# Altium PCB ArtFire.PcbDoc
Units mm, origin at the board's own origin, x right, y up, seen from the top; angles counter-clockwise.
Board outline 96 x 89 mm, 2 copper layers (Top Layer, Bottom Layer); 111 components, 87 nets, 382 pads, 157 vias.
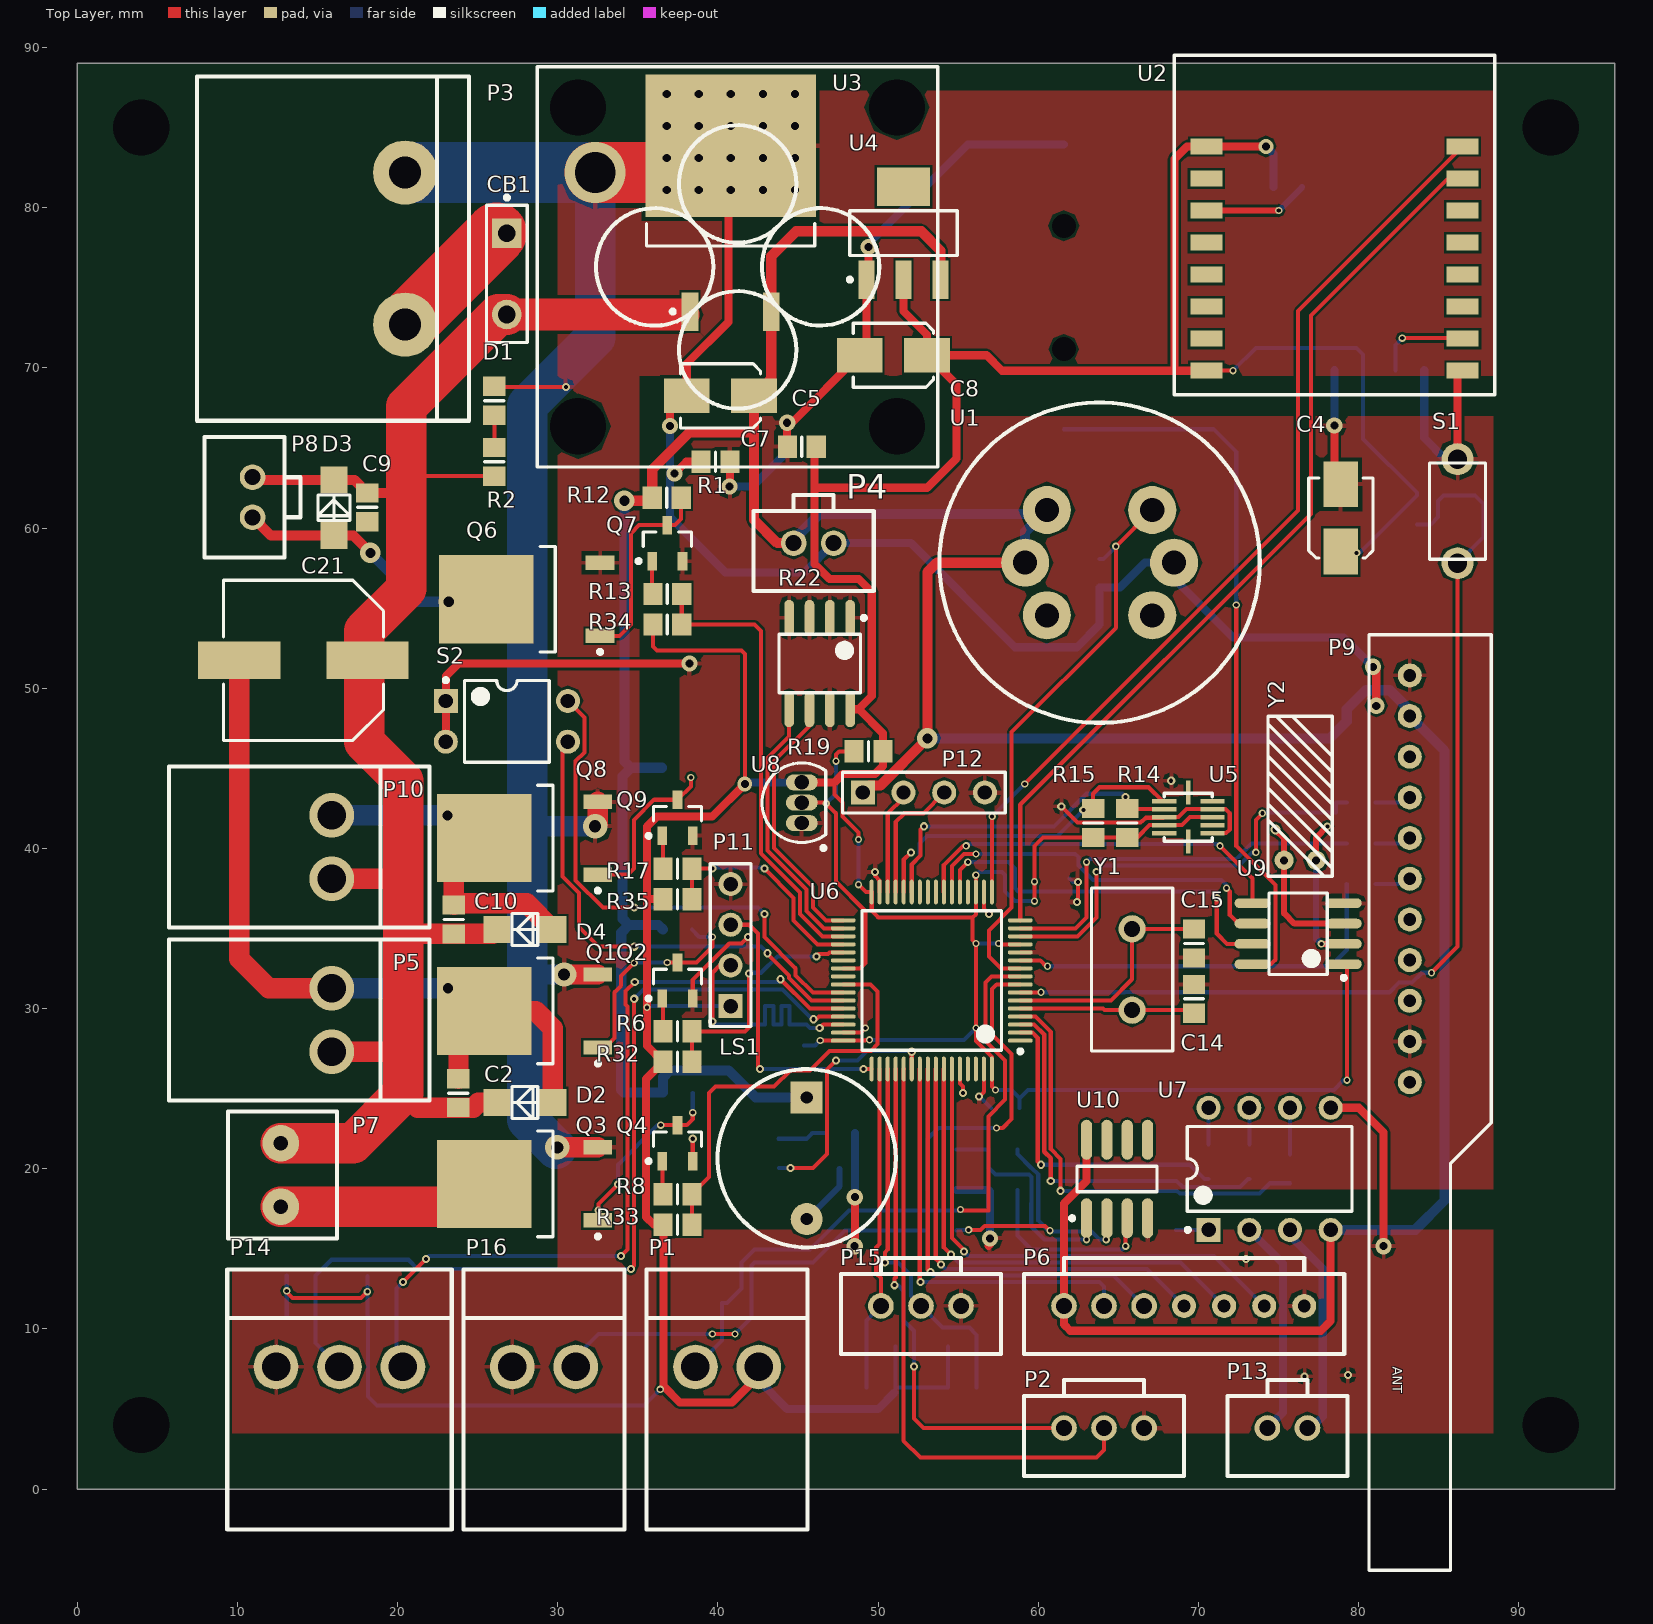
[diagram p0: Top Layer view]
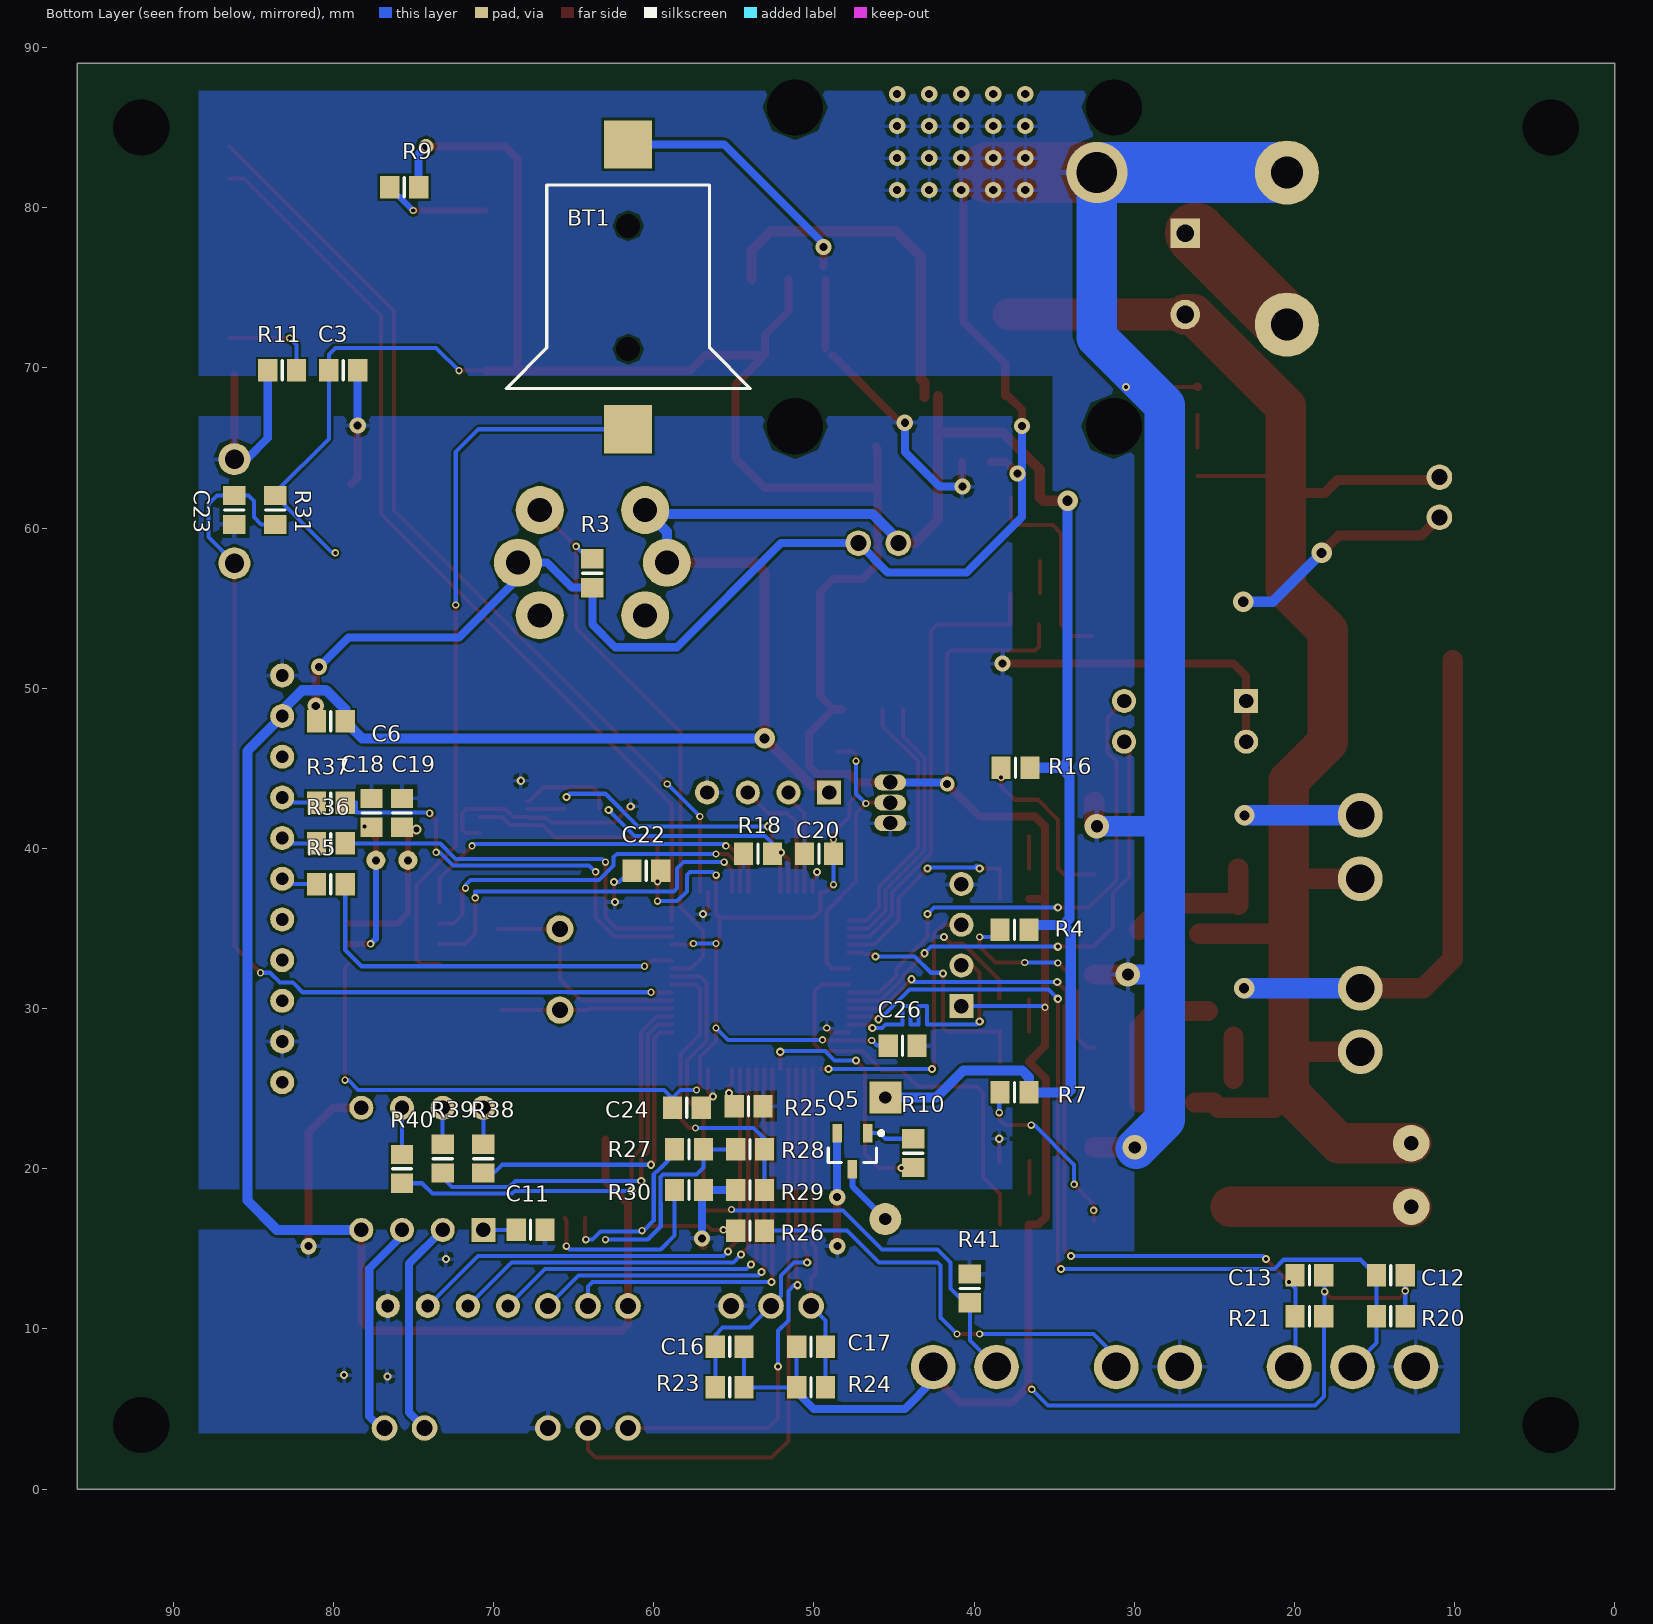
[diagram p1: Bottom Layer view, seen from below]

## Layer stack, top to bottom
Top Solder: solder mask 0.0102, Solder Resist, Dk 3.5
Top Layer: signal copper 0.0356
Dielectric 1: dielectric 0.32, FR-4, Dk 4.8
Bottom Layer: signal copper 0.0356
Bottom Solder: solder mask 0.0102, Solder Resist, Dk 3.5

## Board outline
0,0 96,0 96,89.002 0,89.002 0,89

## Design rules (kind name [scope] priority, off if disabled: settings)
Clearance [All] p1: gap=0.152
MinimumSolderMaskSliver [All] p1: minsoldermaskwidth=0.025
PolygonConnect [All] p1: connectstyle=Relief reliefconductorwidth=0.254 reliefentries=4 polygonreliefangle="90 Angle" airgapwidth=0.254
RoutingVias [All] p1: holewidth=0.254 width=0.457 viastyle="Through Hole" minholewidth=0.254 minwidth=0.457 maxholewidth=10 maxwidth=10
SilkToBoardRegionClearance [All] p1 off:
SilkToSilkClearance [All] p1 off: silktosilkclearance=0.254
SilkToSolderMaskClearance [IsPad] p1: minsilkscreentomaskgap=0 clearancetoexposedcopper=TRUE
SolderMaskExpansion [All] p1: expansion=0.102
UnpouredPolygon [All] p1: allowunpoured=FALSE
Width [All] p1: maxlimit=10 minlimit=0.25 preferedwidth=0.25
25 further rules are at their usual default settings.

## Components (designator, comment, footprint, x,y, rotation, side; value= is the part's Value field where it differs from the comment)
BT1 "Battery" Battery_1302 61.598,66.167 r90 bottom
C2 "Cap Semi" 6-0805_N 23.802,24.714 r90 top
C3 "Cap Semi" 6-0805_N 79.39,69.85 r180 bottom
C4 "Cap Pol1" Cap_5*4mm 78.895,60.63 r90 top
C5 "Cap Pol1" Cap_5*4mm 40.16,68.25 r180 top
C6 "Cap Semi" 6-0805_N 80.165,47.93 r0 bottom
C7 "Cap Semi" 6-0805_N 45.24,65.075 r180 top
C8 "Cap Pol1" Cap_5*4mm 50.955,70.79 r180 top
C9 "Cap Semi" 6-0805_N 18.113,61.29 r270 top
C10 "Cap Semi" 6-0805_N 23.51,35.56 r90 top
C11 "Cap Semi" 6-0805_N 67.694,16.18 r0 bottom
C12 "Cap Semi" 6-0805_N 13.985,13.335 r180 bottom
C13 "Cap Semi" 6-0805_N 19.065,13.335 r180 bottom
C14 "Cap Semi" 6-0805_N 69.726,30.607 r90 top
C15 "Cap Semi" 6-0805_N 69.726,34.062 r270 top
C16 "Cap Semi" 6-0805_N 55.26,8.89 r180 bottom
C17 "Cap Semi" 6-0805_N 50.18,8.89 r0 bottom
C18 "Cap Semi" 6-0805_N 77.625,42.215 r270 bottom
C19 "Cap Semi" 6-0805_N 75.72,42.215 r270 bottom
C20 "Cap Semi" 6-0805_N 49.685,39.675 r0 bottom
C21 "Cap Pol1" CAP_10*10MM 14.125,51.74 r180 top
C22 "Cap Semi" 6-0805_N 60.467,38.608 r0 bottom
C23 "Cap Semi" 6-0805_N 86.185,61.125 r90 bottom
C24 "Cap Semi" 6-0805_N 57.94,23.8 r180 bottom
C26 "Cap Semi" 6-0805_N 44.465,27.686 r180 bottom
CB1 "RF16700" SPST-2 26.825,75.87 r270 top
D1 "PWR" 6-0805_N 26.05,67.945 r90 top
D2 "Diode" US1M 27.955,24.13 r180 top
D3 "Diode" US1M 16.03,61.265 r90 top
D4 "Diode" US1M 27.955,34.925 r180 top
LS1 "Buzzer" BUZZER 45.545,20.65 r90 top
P1 "Alcohol_C" CH3.96_2P 42.56,7.62 r180 top
P2 "Alcohol_Detect" XH2.54-3P 61.61,3.81 r0 top
P3 "HB-9500" HB-9500 20.475,72.695 r90 top
P4 "Fan" XH2.54-2P 44.732,59.055 r0 top
P5 "Pump2" CH3.96_2P 15.89,27.305 r90 top
P6 "XH2.54-7P" XH2.54-7P 61.61,11.43 r0 top
P7 "Fire_Up" KF3.96_2P 12.715,21.59 r0 top
P8 "Fan" XH2.54-2P 10.95,63.17 r270 top
P9 "Superheterodyne_Receiver" Sperheterodyne_Receiver 83.2,25.4 r180 top
P10 "Pump_1" CH3.96_2P 15.89,38.1 r90 top
P11 "Debug_Port" HDR1X4 40.795,30.15 r90 top
P12 "UART_Debug_Port" HDR1X4 49.05,43.485 r0 top
P13 "Speaker" XH2.54-2P 74.31,3.81 r0 top
P14 "Fire_Detect" CH3.96_3P 20.335,7.62 r180 top
P15 "Leakage_Detect" XH2.54-3P 50.18,11.43 r0 top
P16 "Thermocouple" CH3.96_2P 31.13,7.62 r180 top
Q1 "ADO484" DPAK_AOD484 27.955,29.845 r180 top
Q2 "NPN" SOT-23_N 37.48,31.75 r90 top
Q3 "ADO484" DPAK_AOD484 27.955,19.05 r180 top
Q4 "NPN" SOT-23_N 37.48,21.59 r90 top
Q5 "NPN" SOT-23_N 47.602,21.095 r270 bottom
Q6 "ADO484" DPAK_AOD484 28.095,55.55 r180 top
Q7 "NPN" SOT-23_N 36.845,59.055 r90 top
Q8 "ADO484" DPAK_AOD484 27.955,40.64 r180 top
Q9 "NPN" SOT-23_N 37.48,41.91 r90 top
R1 "Res3" 6-0805_N 39.855,64.135 r0 top
R2 "Res" 6-0805_N 26.05,64.135 r270 top
R3 "Res3" 6-0805_N 63.833,57.176 r270 bottom
R4 "Res3" 6-0805_N 37.48,34.925 r0 bottom
R5 "Res3" 6-0805_N 80.165,37.77 r180 bottom
R6 "Res3" 6-0805_N 37.48,28.575 r180 top
R7 "Res3" 6-0805_N 37.48,24.765 r0 bottom
R8 "Res3" 6-0805_N 37.48,18.415 r180 top
R9 "Res3" 6-0805_N 75.58,81.28 r180 bottom
R10 "Res3" 6-0805_N 43.792,20.968 r270 bottom
R11 "Res3" 6-0805_N 83.2,69.85 r0 bottom
R12 "Res3" 6-0805_N 36.807,61.9 r0 top
R13 "Res3" 6-0805_N 36.845,55.88 r180 top
R14 "Res3" 6-0805_N 65.56,41.58 r90 top
R15 "Res3" 6-0805_N 63.426,41.58 r90 top
R16 "Res3" 6-0805_N 37.417,45.034 r0 bottom
R17 "Res3" 6-0805_N 37.48,38.735 r180 top
R18 "Res3" 6-0805_N 53.495,39.675 r180 bottom
R19 "Res3" 6-0805_N 49.406,46.05 r0 top
R20 "Res3" 6-0805_N 13.985,10.795 r180 bottom
R21 "Res3" 6-0805_N 19.065,10.795 r180 bottom
R22 "AT24C02" SOP8_TDA2822 46.358,51.537 r270 top
R23 "Res3" 6-0805_N 55.26,6.35 r180 bottom
R24 "Res3" 6-0805_N 50.18,6.35 r0 bottom
R25 "Res3" 6-0805_N 54.079,23.902 r0 bottom
R26 "Res3" 6-0805_N 53.99,16.129 r0 bottom
R27 "Res3" 6-0805_N 57.8,21.209 r180 bottom
R28 "Res3" 6-0805_N 53.99,21.209 r0 bottom
R29 "Res3" 6-0805_N 53.99,18.669 r180 bottom
R30 "Res3" 6-0805_N 57.8,18.669 r0 bottom
R31 "Res3" 6-0805_N 83.645,61.125 r270 bottom
R32 "Res3" 6-0805_N 37.48,26.67 r180 top
R33 "Res3" 6-0805_N 37.48,16.51 r180 top
R34 "Res3" 6-0805_N 36.845,53.975 r180 top
R35 "Res3" 6-0805_N 37.48,36.83 r180 top
R36 "Res3" 6-0805_N 80.165,40.31 r180 bottom
R37 "Res3" 6-0805_N 80.165,42.85 r180 bottom
R38 "Res3" 6-0805_N 70.64,20.625 r270 bottom
R39 "Res3" 6-0805_N 73.18,20.625 r270 bottom
R40 "Res3" 6-0805_N 75.72,19.99 r270 bottom
R41 "Res3" 6-0805_N 40.262,12.522 r270 bottom
S1 "Reset" SWP_PB_6.5mm 86.185,64.3 r270 top
S2 "SW DIP-2" DIP-4 26.825,47.93 r0 top
U1 "MQ_Alcohol" MQ 63.833,57.836 r0 top
U2 "ESP-07" ESP-07_Wifi 70.5,83.82 r0 top
U3 "L7805CD2T-TR" D2PAK_N 40.795,80.315 r90 top
U4 "AMS1117" SOT223_N 51.59,78.41 r90 top
U5 "MMA7660FC" DFN-10P 69.37,40.945 r90 top
U6 "STM32F103RBT7" LQFP64_L 53.355,31.75 r180 top
U7 "YF017" DIP-8 74.45,19.99 r90 top
U8 "DS18B20" TO-92A 45.24,42.85 r0 top
U9 "DS1302" SOP8_TDA2822 76.228,34.671 r180 top
U10 "LM358AMX" M08A_M 64.925,19.355 r90 top
Y1 "XTAL" XTAL 65.865,32.436 r270 top
Y2 "XTAL" 32.768Cystal 75.355,39.255 r90 top

## Footprints (in the part's own frame and the unit in brackets; to place one, negate y for a bottom-side part, rotate by r counter-clockwise, add the part's x,y. Pads: shape width x height; smd on the part's side, far side on the other; paste and mask are expansions set on the pad)
6-0805_N [mm] "Chip Resistor, Body 2.0x1.2mm, IPC Medium Density"
  rect 1.2x1.4 smd: 1(-0.9,0) 2(0.9,0)
  silkscreen extent 0,-0.6 0,0.6, body extent -1.07,-0.7 1.07,0.7, height 0.7
32.768Cystal [mm]
  round 1.2 hole 0.5: 1(0,0) 2(0,-2)
  silkscreen extent -1,-3 9,1
Battery_1302 [mm]
  rect 3x3 smd: 1(0,0) 2(17.78,0)
  round 1 hole 1.5: 3(12.7,0) 4(5,0)
  silkscreen extent 2.54,-7.62 15.24,7.62
BUZZER [mm]
  rect 2x2 hole 0.762: 1(3.8,0)
  round 2 hole 0.762: 2(-3.8,0)
  silkscreen extent -5.57,-5.57 5.57,5.56
Cap_5*4mm [mm]
  rect 2.85x2.15 smd: 1(-2.1,0) 2(2.1,0)
  silkscreen extent -2.5,-2 2.5,2, body extent -2.5,-2 2.5,2, height 6
CAP_10*10MM [mm]
  rect 5.15x2.35 smd: 1(-4,0) 2(4,0)
  silkscreen extent -5,-5 5,5, body extent -5,-5 5,5, height 10
CH3.96_2P [mil]
  round 110 hole 70: 1(0,0) 2(155.91,0)
  silkscreen extent -120,-240 276,400
CH3.96_3P [mil]
  round 110 hole 70: 1(0,0) 2(155.91,0) 3(311.81,0)
  silkscreen extent -120,-240 432,400
D2PAK_N [mm] "D2-PAK, 4-Leads, Body 8.8x10.4mm, Pitch 2.54mm, Lead Span 15.1mm, IPC Medium Density"
  rect 2.4x1.05 smd: 1(-6.8,2.54) 3(-6.8,-2.54)
  rect 8.9x10.65 smd: 2(3.55,0)
  silkscreen extent -6.92,-5.25 -1.3,5.25, body extent -2.7,-5.28 6.3,5.28, height 4.69
DFN-10P [mm]
  rect 1.5x0.3 smd: 0(-0.508,0) 0(2.54,0)
  rect 0.3x1.5 smd: 1(0,-1.5) 2(0.5,-1.5) 3(1,-1.5) 4(1.5,-1.5) 5(2,-1.5) 6(2,1.5) 7(1.5,1.5) 8(1,1.5) 9(0.5,1.5) 10(0,1.5)
  silkscreen extent -0.5,-1.5 2.5,1.5
DIP-4 [mm] "DIP; 4 Leads; Row Spacing 7.62 mm; Pitch 2.54 mm"
  rect 1.5x1.5 hole 0.9: 1(-3.81,1.27)
  round 1.5 hole 0.9: 2(-3.81,-1.27) 3(3.81,-1.27) 4(3.81,1.27)
  silkscreen extent -3.93,-2.55 2.65,2.69, body extent -3.15,-2.5 3.15,2.5, height 5.6
DIP-8 [mm] "DIP; 8 Leads; Row Spacing 7.62 mm; Pitch 2.54 mm"
  rect 1.5x1.5 hole 0.9: 1(-3.81,3.81)
  round 1.5 hole 0.9: 2(-3.81,1.27) 3(-3.81,-1.27) 4(-3.81,-3.81) 5(3.81,-3.81) 6(3.81,-1.27) 7(3.81,1.27) 8(3.81,3.81)
  silkscreen extent -3.93,-5.15 2.65,5.23, body extent -3.6,-5.15 3.6,5.15, height 5.08
DPAK_AOD484 [mm] "D-PAK, 3-Pads, Body 5.95x6.66mm (max), IPC Medium Density"
  rect 1.8x0.9 smd: 1(-4.55,2.28) 3(-4.55,-2.28)
  rect 5.9x5.5 smd: 2(2.55,0)
  silkscreen extent -4.68,-3.3 -0.8,3.4, body extent -1.75,-3.3 3.95,3.3, height 2.38
ESP-07_Wifi [mm]
  rect 2x1 smd: 1(0,0) 2(0,-2) 3(0,-4) 4(0,-6) 5(0,-8) 6(0,-10) 7(0,-12) 8(0,-14) 9(16,-14) 10(16,-12) 11(16,-10) 12(16,-8) 13(16,-6) 14(16,-4) 15(16,-2) 16(16,0)
  silkscreen extent -2,-15.5 18,5.7
HB-9500 [mm]
  round 4 hole 2: 1(0,0) 2(9.5,0)
  silkscreen extent -6,-4 15.5,13
HDR1X4 [mm] "Connector; Header; 4 Position"
  rect 1.5x1.5 hole 0.9: 1(0,0)
  round 1.5 hole 0.9: 2(2.54,0) 3(5.08,0) 4(7.62,0)
  silkscreen extent -1.27,-1.27 8.89,1.27
KF3.96_2P [mil]
  round 90 hole 35.43: 1(0,0) 2(0,-155.91)
  silkscreen extent -130,-234 138,78
LQFP64_L [mm] "Thin QFP, 64-Leads, Body 10x10mm, Pitch 0.5mm, IPC High Density"
  oval 1.55x0.25 smd: 1(-5.525,3.75) 2(-5.525,3.25) 3(-5.525,2.75) 4(-5.525,2.25) 5(-5.525,1.75) 6(-5.525,1.25) 7(-5.525,0.75) 8(-5.525,0.25) 9(-5.525,-0.25) 10(-5.525,-0.75) 11(-5.525,-1.25) 12(-5.525,-1.75) 13(-5.525,-2.25) 14(-5.525,-2.75) 15(-5.525,-3.25) 16(-5.525,-3.75) 33(5.525,-3.75) 34(5.525,-3.25) 35(5.525,-2.75) 36(5.525,-2.25) 37(5.525,-1.75) 38(5.525,-1.25) 39(5.525,-0.75) 40(5.525,-0.25) 41(5.525,0.25) 42(5.525,0.75) 43(5.525,1.25) 44(5.525,1.75) 45(5.525,2.25) 46(5.525,2.75) 47(5.525,3.25) 48(5.525,3.75)
  oval 0.25x1.55 smd: 17(-3.75,-5.525) 18(-3.25,-5.525) 19(-2.75,-5.525) 20(-2.25,-5.525) 21(-1.75,-5.525) 22(-1.25,-5.525) 23(-0.75,-5.525) 24(-0.25,-5.525) 25(0.25,-5.525) 26(0.75,-5.525) 27(1.25,-5.525) 28(1.75,-5.525) 29(2.25,-5.525) 30(2.75,-5.525) 31(3.25,-5.525) 32(3.75,-5.525) 49(3.75,5.525) 50(3.25,5.525) 51(2.75,5.525) 52(2.25,5.525) 53(1.75,5.525) 54(1.25,5.525) 55(0.75,5.525) 56(0.25,5.525) 57(-0.25,5.525) 58(-0.75,5.525) 59(-1.25,5.525) 60(-1.75,5.525) 61(-2.25,5.525) 62(-2.75,5.525) 63(-3.25,5.525) 64(-3.75,5.525)
  silkscreen extent -5.65,-4.35 4.35,4.55, body extent -5,-5 5,5, height 1.6
M08A_M [mm] "SOIC, 8-Leads, Body 4.9x3.9mm, Pitch 1.27mm, IPC Low Density"
  oval 2.5x0.7 smd: 1(-2.45,1.905) 2(-2.45,0.635) 3(-2.45,-0.635) 4(-2.45,-1.905) 5(2.45,-1.905) 6(2.45,-0.635) 7(2.45,0.635) 8(2.45,1.905)
  silkscreen extent -2.57,-2.5 0.8,2.93, body extent -2,-2.5 2,2.5, height 1.75
MQ [mm]
  round 3 hole 1.5: 1(-3.288,3.288) 2(-4.65,0) 3(-3.288,-3.288) 4(3.288,-3.288) 5(4.65,0) 6(3.288,3.288)
  silkscreen extent -10,-10 10,10
SOP8_TDA2822 [mm] "TSOP, 8-Leads, Body 5.00x3.95mm, Pitch 1.27mm, IPC Medium Density"
  oval 2.25x0.6 smd: 1(-2.85,1.905) 2(-2.85,0.635) 3(-2.85,-0.635) 4(-2.85,-1.905) 5(2.85,-1.905) 6(2.85,-0.635) 7(2.85,0.635) 8(2.85,1.905)
  silkscreen extent -2.97,-2.55 1.83,2.88, body extent -2,-2.55 2,2.55, height 1.55
SOT223_N [mm] "SOT223, 4-Leads, Body 6.5x3.5mm, Pitch 2.3mm, Lead Span 7mm, IPC Medium Density"
  rect 2.4x1 smd: 1(-2.9,2.3) 2(-2.9,0) 3(-2.9,-2.3)
  rect 2.4x3.3 smd: 4(2.9,0)
  silkscreen extent -3.02,-3.35 1.4,3.47, body extent -1.85,-3.35 1.85,3.35, height 1.7
SOT-23_N [mm] "SOT23, 3-Leads, Body 2.9x1.3mm, Pitch 0.95mm, Lead Span 2.5mm, IPC Medium Density"
  rect 1.15x0.6 smd: 1(-1.125,0.95) 2(-1.125,-0.95) 3(1.125,0)
  silkscreen extent -1.25,-1.5 0.7,1.92, body extent -0.7,-1.5 0.7,1.5, height 1.1
Sperheterodyne_Receiver [mm]
  round 1.5 hole 0.8: 1(0,0) 2(0,-2.54) 3(0,-5.08) 4(0,-7.62) 5(0,-10.16) 6(0,-12.7) 7(0,-15.24) 8(0,-17.78) 9(0,-20.32) 10(0,-22.86) 11(0,-25.4)
  silkscreen extent -5.08,-27.94 2.54,30.48
SPST-2 [mm] "Switch; 2 Leads"
  rect 1.85x1.85 hole 1.1: 1(-2.54,0)
  round 1.85 hole 1.1: 2(2.54,0)
  silkscreen extent -4.89,-1.27 4.28,1.27
SWP_PB_6.5mm [mm]
  round 2 hole 1.2: 1(0,0) 2(6.5,0)
  silkscreen extent 0.25,-1.75 6.25,1.75
TO-92A [mm] "TO, Flat Index; 3 In-Line, Axial Leads; Body Dia. 4.5mm; Leads 0.51 x 0.48 mm (max)"
  oval 2x1 hole 0.9: 1(0,-1.27) 2(0,0) 3(0,1.27)
  silkscreen extent -2.48,-2.95 1.5,2.48, body extent -2.5,-2.5 1.5,2.5, height 6.86
US1M [mm]
  rect 1.7x1.7 smd: 1(-1.74,0) 2(1.74,0)
  silkscreen extent -0.8,-1 0.8,1
XH2.54-2P [mm]
  round 1.6 hole 1: 1(0,0) 2(2.5,0)
  silkscreen extent -2.5,-3 5,3
XH2.54-3P [mm]
  round 1.6 hole 1: 1(0,0) 2(2.5,0) 3(5,0)
  silkscreen extent -2.5,-3 7.5,3
XH2.54-7P [mm]
  round 1.6 hole 1: 1(0,0) 2(2.5,0) 3(5,0)
  round 1.5 hole 0.8: 4(7.5,0) 5(10,0) 6(12.5,0) 7(15,0)
  silkscreen extent -2.5,-3 17.5,3
XTAL [mm]
  round 1.7 hole 1: 1(-2.54,0) 2(2.54,0)
  silkscreen extent -5.08,-2.54 5.08,2.54

## Part data
BT1: "Multicell Battery"
C2 C3 C6 C7 C9 C10 C11 C12 C13 C14 C15 C16 C17 C18 C19 C20 C22 C23 C24 C26: "Capacitor (Semiconductor SIM Model)"
C4 C5 C8 C21: "Polarized Capacitor (Radial)"
CB1: library part "Circuit Breaker", "Circuit Breaker"
D1: library part LED0, "Typical INFRARED GaAs LED"
D2 D3 D4: library part "Diode BAT17", "Silicon RF Schottky Diode for Mixer Applications in the VHF/UHF Range"
LS1: "Magnetic Transducer Buzzer"
P1 P5 P10 P16: library part CH3.96_2P
P2 P15: library part XH2.54-3P
P3: "High current connector"
P4 P8 P13: library part XH2.54-2P
P7: library part KF3.96
P11 P12: library part "Header 4", "Header, 4-Pin"
P14: library part CH3.96_3P
Q1 Q3 Q6 Q8: library part NMOS-2, "N-Channel Power MOSFET"
Q2 Q4 Q5 Q7 Q9: "NPN Bipolar Transistor"
R1 R3 R4 R5 R6 R7 R8 R9 R10 R11 R12 R13 R14 R15 R16 R17 R18 R19 R20 R21 R23 R24 R25 R26 R27 R28 R29 R30 R31 R32 R33 R34 R35 R36 R37 R38 R39 R40 R41: "Resistor"
R2: library part Res1, "Resistor"
S1: library part SW-PB, "Switch"
S2: "DIP Switch, 2 Position, SPST"
U1: library part MQ
U2: library part ESP-07_Wifi
U3: library part CMP-0244-00485-1, "Positive Voltage Regulator, 5V, 3-Pin TO-220"
U6: library part CMP-0237-00161-1, "STM32 ARM-based 32-bit MCU Performance Line with 128 kB Flash, 20 kB Internal RAM, -40 to +105°C Temperature, 64-Pin LQFP, Tray"
U10: library part CMP-0055-00768-2, "Low Power Dual Operational Amplifier, 8-pin Narrow SOIC"
Y1 Y2: "Crystal Oscillator"

## Free pads (board coordinates)
  round 1 hole 3.5: 0(4,4) 0(4,85) 0(31.267,86.258) 0(31.28,66.355) 0(51.18,66.355) 0(51.18,86.255) 0(92,4) 0(92,85)

## Via types
v1: diameter 0.457, hole 0.254, Top Layer to Bottom Layer, 59 vias
v2: diameter 0.508, hole 0.254, Top Layer to Bottom Layer, 52 vias
v3: diameter 1.016, hole 0.508, Top Layer to Bottom Layer, 33 vias
v4: diameter 1.27, hole 0.635, Top Layer to Bottom Layer, 6 vias
v5: diameter 1.524, hole 0.762, Top Layer to Bottom Layer, 3 vias
v6: diameter 3.81, hole 2.54, Top Layer to Bottom Layer, 1 vias
v7: diameter 0.914, hole 0.508, Top Layer to Bottom Layer, 1 vias
v8: diameter 0.635, hole 0.381, Top Layer to Bottom Layer, 1 vias
v9: diameter 0.965, hole 0.508, Top Layer to Bottom Layer, 1 vias

## Nets (pads, with @x,y where several pads share a name; then routed paths per layer and width w, separated by ;. In a path a pad name is that pad's centre, name@x,y a point inside that pad or via, vN(x,y) a via of type N, cw(c..) or ccw(c..) an arc to the next point about the centre after c; other vN are vias at no path point)
+3.3V: C3.1 C4.1 C7.1 C8.1 C12.2 C13.2 C16.2 C17.2 C20.1 C22.1 C24.1 C26.1 P1.1 P11.1 R9.2 R14.1 R15.1 R19.2 R20.2 R21.2 R22.8 R23.2 R24.2 R31.1 R32.2 R33.2 R34.2 R35.2 U2.1 U2.8 U4.2 U5.3 U5.9 U6.13 U6.19 U6.32 U6.48 U6.64 U8.3 U9.1 | length 342.4
  Top Layer w0.254: v1(13.085,12.371) 13.085,12.267 13.439,11.913 17.706,11.913 v1(18.113,12.319) ; R34.2 35.945,52.602 36.198,52.35 41.481,52.35 41.684,52.146 v7(41.684,44.018) ; v1(36.401,6.223) 36.604,6.426 ; v1(46.392,28) U6.48 49.186,28 49.228,28.042 v1(49.469,28.042) ; 47.272,44.12 47.272,43.374 47.78,42.866 47.78,41.986 48.785,40.981 v1(48.785,40.553) ; v1(48.785,37.73) 49.24,37.275 U6.32 49.609,37.271 49.609,36.094 50.015,35.687 55.908,35.687 ; v1(56.105,38.323) U6.19 56.105,35.884 55.908,35.687 ; v1(57.33,24.918) 57.105,25.143 U6.64 57.105,26.972 56.111,27.966 v1(56.111,28.778) v1(56.111,34.062) 55.908,34.265 55.908,35.687 ; v1(57.534,34.062) 57.595,34 U6.13 ; v1(59.769,36.703) v1(59.769,37.922) 59.769,40.158 60.291,40.68 R15.1 R14.1 66.184,40.68 66.949,41.445 U5.9 68.981,41.445 69.481,41.945 U5.3 ; U2.8@70.505,69.825 v1(72.164,69.825) ; U9.1 79.276,32.568 v1(79.276,25.527)
  Top Layer w0.508: R35.2 35.715,36.83 35.574,36.689 ; v7(41.684,44.018) 39.652,41.986 36.198,41.986 35.574,41.362 35.574,36.689 ; P1.1 42.56,7.099 40.871,5.41 37.62,5.41 36.604,6.426 36.604,16.486 R33.2 35.995,16.51 35.512,16.993 35.512,25.602 R32.2 35.574,27.676 35.574,36.689 ; U8.3 47.272,44.12 47.793,44.641 49.812,44.641 50.306,45.135 R19.2 50.306,47.182 48.801,48.687 48.791,48.687 ; C7.1 46.026,64.961 46.026,62.51 ; R22.8 48.791,48.687 ; U4.2 51.59,73.533 53.055,72.068 C8.1 ; U2.8 68.506,69.82 ; v9(74.222,83.82) U2.1 69.294,83.82 68.506,83.033 68.506,69.82 ; 46.026,62.51 53.063,62.51 54.892,64.338 54.892,68.953 C8.1 ; 46.026,62.51 46.026,57.762 46.967,56.82 48.796,56.82 49.609,56.007 49.609,49.505 48.791,48.687 ; C8.1 56.772,70.79 57.742,69.82 68.506,69.82
  Bottom Layer w0.254: R20.2 v1(13.085,12.371) C12.2 ; R21.2@18.113,10.847 v1(18.113,12.319) C13.2@18.113,13.283 ; R21.2 18.165,5.765 18.722,5.207 35.385,5.207 v1(36.401,6.223) ; v1(35.574,30.074) 35.65,30.15 P11.1 ; C26.1 46.078,27.686 v1(46.392,28) ; v1(48.785,37.73) C20.1 v1(48.785,40.553) ; v1(49.469,28.042) 55.374,28.042 v1(56.111,28.778) ; C17.2 R24.2 R23.2 C16.2 ; v1(56.105,38.323) 56.314,38.532 57.737,38.532 57.94,38.329 57.94,37.313 58.55,36.703 v1(59.769,36.703) ; v1(56.111,34.062) v1(57.534,34.062) ; v1(57.33,24.918) 58.346,24.918 58.84,24.424 C24.1@58.84,24.395 ; C24.1 C24.1@58.84,24.395 ; v1(72.164,69.825) 73.586,71.247 79.886,71.247 80.29,70.843 C3.1 80.29,65.56 83.645,62.205 R31.1 80.066,58.446 v1(79.886,58.446) ; v1(79.276,25.527) 79.073,25.527 78.463,24.918 59.362,24.918 C24.1@58.84,24.395
  Bottom Layer w0.508: v7(41.684,44.018) 41.786,44.12 U8.3 ; P1.1 42.56,6.77 44.326,5.004 50.015,5.004 R24.2@51.031,6.02 ; v9(74.222,83.82) 74.68,83.362 R9.2
+5V: C5.1 C6.1 LS1.1 P4.1 P6.1 P9.10 P12.1 R4.1 R7.1 R12.1 R16.1 U1.1 U1.2 U3.3 U4.3 U7.4 U10.8 | length 248.3
  Top Layer w0.508: U10.8 63.02,19.228 61.61,17.818 P6.1 61.61,10.275 62.004,9.881 77.65,9.881 78.26,10.49 U7.4
  Top Layer w0.635: v4(34.166,61.697) 35.704,61.697 R12.1 35.907,63.654 38.217,65.964 42.26,65.964 ; C5.1 42.26,65.964 ; C5.1@43.106,68.199 43.106,69.096 43.335,69.325 U3.3 43.335,76.962 44.897,78.524 52.695,78.524 53.89,77.329 U4.3 ; P4.1 43.716,59.055 42.26,60.511 42.26,65.964 ; P12.1 49.483,43.918 50.137,43.918 v4(53.083,46.863) 53.083,57.246 53.673,57.836 U1.2
  Bottom Layer w0.635: v4(34.166,61.697) 34.166,45.441 34.572,45.034 ; R16.1 34.572,45.034 ; R4.1 36.294,35.211 34.438,35.211 ; P4.1 44.732,59.258 46.358,60.884 U1.1@60.305,60.884 ; LS1.1 42.354,24.45 40.668,26.137 37.01,26.137 36.58,25.706 R7.1 34.115,24.765 33.962,24.918 33.962,34.736 34.438,35.211 ; v4(53.083,46.863) 78.198,46.863 C6.1 79.265,48.681 80.457,49.873 81.956,49.873 83.2,48.629 P9.10 85.372,46.088 85.372,18.009 83.543,16.18 U7.4 ; U1.2 59.183,59.762 U1.1@60.305,60.884 ; U1.1 U1.1@60.305,60.884 ; 34.438,35.211 34.051,35.598 34.051,44.514 34.572,45.034
+12V: C2.1 C9.1 C10.1 C21.1 CB1.2 D2.2 D3.2 D4.2 P5.1 P7.1 P8.1 P10.1 R2.2 U3.1 | length 110.9
  Top Layer w0.254: 20.667,63.235 R2.2
  Top Layer w0.635: P8.1 11.115,63.005 D3.2 17.298,63.005 C9.1 20.435,62.19
  Top Layer w1.27: P5.1 19.383,27.305 ; P10.1 19.306,38.1 ; 20.348,24.714 21.248,23.814 C2.1 24.731,23.814 25.047,24.13 D2.2 ; 20.348,34.671 D4.2@25.961,34.671 ; 20.359,34.66 C10.1
  Top Layer w2: CB1.2 U3.1@37.867,73.33
  Top Layer w2.54: P7.1 17.224,21.59 20.348,24.714 20.348,34.671 20.348,44.222 17.914,46.655 17.914,53.573 20.551,56.21 20.551,67.59 26.292,73.33 CB1.2
ADH: P2.1 U6.52 | length 32.1
  Top Layer w0.254: v2(51.031,12.726) 51.031,13.132 51.105,13.206 U6.52 ; v2(52.25,7.646) 52.25,4.394 52.835,3.81 P2.1
  Bottom Layer w0.254: v2(51.031,12.726) 51.234,12.726 51.601,12.359 51.601,10.531 52.25,9.881 v2(52.25,7.646)
ADL: P2.2 U6.53 | length 37.7
  Top Layer w0.254: U6.53 51.601,26.221 51.601,3.012 52.657,1.956 63.63,1.956 64.11,2.436 P2.2
ALC: P1.2 R41.2 U6.9 | length 42.3
  Top Layer w0.254: v1(55.146,17.45) 55.113,17.45 55.062,17.399 56.886,17.399 56.886,23.254 57.94,24.308 57.94,26.746 56.721,27.966 56.721,31.623 57.098,32 U6.9
  Bottom Layer w0.254: P1.2 40.262,9.282 R41.2 40.581,11.622 41.481,12.522 41.481,14.148 42.294,14.961 45.748,14.961 48.186,17.399 v1@55.095,17.399
ALCOHOL_C: R3.1 U1.6 U6.10 | length 35.7
  Top Layer w0.254: U6.10 57.673,32.5 56.924,33.249 56.924,34.874 58.346,36.297 58.346,47.27 64.849,53.772 v1(64.849,58.852) U1.6
  Bottom Layer w0.254: R3.1 64.072,58.076 v1(64.849,58.852)
BEE: R10.2 U6.54 | length 15.5
  Top Layer w0.254: v2(44.529,20.041) 45.951,20.041 46.824,20.914 46.824,26.197 v2(47.374,26.746) ; U6.54 v2(52.105,27.298)
  Bottom Layer w0.254: R10.2@43.819,20.041 v2(44.529,20.041) ; v2(47.374,26.746) 48.708,26.746 49.317,27.356 52.047,27.356 v2(52.105,27.298)
DEBUG_RX: P12.3 U6.29 | length 8.2
  Top Layer w0.254: U6.29 51.105,41.654 51.641,42.19 52.835,42.19 P12.3
DEBUG_TX: P12.2 U6.30 | length 6.6
  Top Layer w0.254: U6.30 50.605,42.17 51.59,43.155 P12.2
E2_SCL: R22.6 U6.33 | length 16.5
  Top Layer w0.254: R22.6 45.723,47.651 43.513,45.441 43.513,40.029 45.951,37.591 45.951,36.297 46.748,35.5 U6.33
E2_SDA: R22.5 U6.34 | length 16.9
  Top Layer w0.254: R22.5 44.453,46.99 43.106,45.644 43.106,39.861 45.545,37.423 45.545,36.094 46.638,35 U6.34
FAN: R13.1 R34.1 U6.35 | length 29
  Top Layer w0.254: R13.1 R34.1 42.294,53.975 42.7,53.569 42.7,39.693 45.138,37.254 45.138,35.89 46.529,34.5 U6.35
FHD: C13.1 P14.1 R21.1 U6.44 | length 51.4
  Top Layer w0.254: v2(20.348,12.929) v2(21.77,14.351) ; v2(33.962,14.554) 34.369,14.961 34.369,30.132 34.242,30.259 34.242,31.09 v2(34.813,31.661) v2@34.813,31.566 ; v2(43.919,31.826) 45.746,30 U6.44
  Bottom Layer w0.254: P14.1 19.942,8.013 19.942,12.522 v2(20.348,12.929) ; v2(21.77,14.351) 21.974,14.554 v2(33.962,14.554) ; v2(34.813,31.661) 43.753,31.661 v2(43.919,31.826)
FIRE_TEM_D: R28.1 R29.2 U6.8 | length 19.5
  Top Layer w0.254: v1(57.394,22.542) 57.787,22.542 58.346,23.102 58.346,27.153 57.127,28.372 57.127,31.217 57.41,31.5 U6.8
  Bottom Layer w0.254: R29.2 R28.1 53.09,21.868 53.764,22.542 v1(57.394,22.542)
FIRE_UP: R8.1 R33.1 U6.41 | length 26.1
  Top Layer w0.254: R33.1 R8.1 39.449,19.484 39.449,24.714 39.855,25.121 43.513,25.121 44.529,26.137 45.748,26.137 46.967,27.356 49.558,27.356 49.977,27.775 49.977,31.052 49.529,31.5 U6.41
FLD: C12.1 P14.2 R20.1 U6.45 | length 57.8
  Top Layer w0.254: v2(34.572,13.742) 34.775,13.945 v2(34.775,30.607) ; v2(45.976,29.331) 45.976,29.363 46.188,29.363 46.325,29.5 U6.45
  Bottom Layer w0.254: P14.2 14.885,9.11 R20.1 C12.1 15.864,14.314 20.681,14.314 21.254,13.742 v2(34.572,13.742) ; v2(34.775,30.607) 35.347,31.179 44.04,31.179 45.889,29.331 v2(45.976,29.331)
IO1: P6.2 U6.55 | length 26.1
  Top Layer w0.254: U6.55 52.605,12.981 v2(52.657,12.929)
  Bottom Layer w0.254: v2(52.657,12.929) 63.833,12.929 64.11,12.652 P6.2
IO2: P6.3 U6.56 | length 27
  Top Layer w0.254: U6.56 53.105,13.7 v2(53.266,13.538)
  Bottom Layer w0.254: v2(53.266,13.538) 53.47,13.335 64.705,13.335 P6.3
IO3: P6.4 U6.57 | length 28.6
  Top Layer w0.254: U6.57 53.605,14.355 v2(53.939,14.021)
  Bottom Layer w0.254: v2(53.939,14.021) 54.218,13.742 66.798,13.742 P6.4
IO4: P6.5 U6.58 | length 30.2
  Top Layer w0.254: U6.58 54.105,15.074 v2(54.549,14.63)
  Bottom Layer w0.254: v2(54.549,14.63) 55.031,14.148 68.892,14.148 P6.5
IO5: P6.6 U6.59 | length 32
  Top Layer w0.254: U6.59 54.605,15.675 55.362,14.919 v2(55.362,14.834)
  Bottom Layer w0.254: v2@55.362,14.707 v2(55.362,14.834) 55.641,14.554 70.986,14.554 P6.6
LDHD: C17.1 P15.1 R24.1 U6.50 | length 20.5
  Top Layer w0.254: U6.50 50.105,15.308 49.888,15.091 49.888,13.462 50.18,13.17 P15.1
  Bottom Layer w0.254: R24.1 C17.1 49.28,10.53 P15.1
LDLD: C16.1 P15.2 R23.1 U6.51 | length 23.8
  Top Layer w0.254: v2(50.422,14.148) 50.422,14.758 50.605,14.941 U6.51
  Bottom Layer w0.254: v2(50.422,14.148) 51.234,14.148 52.047,13.335 52.047,12.063 P15.2 54.026,10.084 55.705,10.084 56.16,9.629 C16.1 R23.1
MMA_SCL: R15.2 R18.2 U5.6 U6.28 | length 20.3
  Top Layer w0.254: U6.28 51.605,39.309 v2(52.047,39.751) ; R15.2 63.426,43.409 63.833,43.815 66.881,43.815 67.751,42.945 U5.6
  Bottom Layer w0.254: R18.2 52.595,40.299 53.063,40.767 61.191,40.767 v2(62.817,42.393)
MMA_SDA: R14.2 U5.7 U6.27 | length 20.3
  Top Layer w0.254: U6.27 52.105,38.996 52.657,39.548 52.657,41.174 v2(52.86,41.377) ; R14.2 65.595,42.445 U5.7
  Bottom Layer w0.254: v2(52.86,41.377) 60.988,41.377 63.02,43.409 65.255,43.409 v2(65.458,43.206)
NetBT1_1: BT1.1 U9.8 | length 45.6
  Top Layer w0.254: v1(72.367,55.194) 72.367,40.158 74.806,37.719 74.806,33.046 74.526,32.766 U9.8
  Bottom Layer w0.254: BT1.1 70.945,66.167 72.367,64.745 v1(72.367,55.194)
NetC2_2: C2.2 C21.2 D2.1 P5.2 Q1.2 | length 44.4
  Top Layer w1.27: C21.2 10.125,33.109 11.969,31.265 P5.2 ; C2.2 Q1.2@23.802,28.242 ; Q1.2 28.629,29.845 29.695,28.779 D2.1
  Bottom Layer w1.27: P5.2 v4(23.145,31.265)
NetC9_2: C9.2 D3.1 P8.2 Q6.2 | length 14.4
  Top Layer w0.635: P8.2 12.095,59.525 D3.1 17.247,59.525 18.316,58.456 v4(18.305,58.446)
  Bottom Layer w0.635: v4(18.305,58.446) 21.353,55.398 v4(23.193,55.398)
NetC10_2: C10.2 D4.1 P10.2 Q8.2 | length 16.4
  Top Layer w1.27: C10.2 C10.2@23.51,36.562 ; Q8.2@23.51,38.745 C10.2@23.51,36.562 ; D4.1 28.058,36.562 C10.2@23.51,36.562
  Bottom Layer w1.27: P10.2 v4(23.119,42.06)
NetC11_2: C11.2 U7.1 | length 2
  Bottom Layer w0.254: C11.2 U7.1
NetC14_1: C14.1 U6.5 Y1.2 | length 10.7
  Top Layer w0.254: U6.5 64.034,30 64.138,29.896 Y1.2 C14.1@69.537,29.896
NetC15_1: C15.1 U6.6 Y1.1 | length 14.5
  Top Layer w0.254: U6.6 64.538,30.5 65.865,31.826 Y1.1 C15.1@69.711,34.976
NetC18_2: C18.2 U9.2 Y2.2 | length 9.5
  Top Layer w0.381: Y2.2 77.355,40.675 v1(78.057,41.377) ; v1(77.676,34.036) U9.2
  Bottom Layer w0.381: Y2.2@77.355,39.57 Y2.2 77.355,34.357 v1(77.676,34.036)
NetC19_2: C19.2 U9.3 Y2.1 | length 9.4
  Top Layer w0.381: v8(74.806,41.174) 75.355,40.624 Y2.1 75.355,35.951 75.999,35.306 U9.3
NetC23_2: C23.2 R31.2 S1.2 U6.7 | length 62.5
  Top Layer w0.254: U6.7 60.162,31 v1(60.175,31.014) ; v1(84.559,32.233) 86.185,33.859 S1.2
  Bottom Layer w0.254: v1(60.175,31.014) 65.385,31.014 65.397,31.025 66.333,31.025 66.344,31.014 81.918,31.014 82.527,31.623 83.34,31.623 83.95,32.233 v1(84.559,32.233) ; R31.2 84.51,60.225 84.966,60.681 84.966,61.697 85.294,62.025 C23.2 87.279,62.025 87.81,61.494 87.81,59.425 S1.2
NetCB1_1: CB1.1 P3.1 | length 8.1
  Top Layer w3.81: P3.1 CB1.1@26.19,78.41
NetD1_1: D1.1 R2.1 | length 2
  Top Layer w0.254: R2.1 D1.1
NetLS1_2: LS1.2 Q5.3 | length 4
  Bottom Layer w0.381: LS1.2 47.602,18.908 Q5.3
NetP7_2: P7.2 Q3.2 | length 11.3
  Top Layer w2.54: P7.2 Q3.2@23.985,17.63
NetP9_6: P9.6 R5.1 | length 1.8
  Bottom Layer w0.254: R5.1 P9.6@82.87,37.77
NetP9_7: P9.7 R36.1 | length 2.3
  Bottom Layer w0.254: R36.1 82.87,40.31 P9.7
NetP9_8: P9.8 R37.1 | length 1.8
  Bottom Layer w0.254: R37.1 P9.8@82.87,42.85
NetP13_1: P13.1 U7.2 | length 13.6
  Bottom Layer w0.508: U7.2 75.275,14.085 75.275,4.775 P13.1
NetP13_2: P13.2 U7.3 | length 13.8
  Bottom Layer w0.508: U7.3 75.72,15.811 77.766,13.765 77.766,4.523 77.053,3.81 P13.2
NetP16_1: P16.1 R26.1 | length 28.1
  Top Layer w0.254: P16.1 P16.1@31.498,7.62 ; v1(39.652,9.678) v1(41.074,9.678)
  Bottom Layer w0.254: P16.1 31.13,8.268 32.54,9.678 v1(39.652,9.678) ; v1(41.074,9.678) 42.09,10.694 42.09,13.945 42.294,14.148 45.951,14.148 47.932,16.129 R26.1
NetQ1_1: Q1.1 Q2.3 R4.2 | length 13.8
  Top Layer w0.254: Q1.1 32.952,27.565 33.556,28.169 33.556,31.014 33.962,31.42 33.962,32.03 v1(34.775,32.842) ; v1(36.84,32.875) Q2.3 38.669,32.875 39.652,33.858 v1(39.652,34.468)
  Bottom Layer w0.254: v1(34.775,32.842) 34.808,32.875 v1(36.84,32.875) ; R4.2 38.837,34.468 v1(39.652,34.468)
NetQ2_1: Q2.1 R6.2 | length 2
  Top Layer w0.254: R6.2 Q2.1@36.58,30.575
NetQ3_1: Q3.1 Q4.3 R7.2 | length 11.4
  Top Layer w0.254: Q3.1 v1@32.505,17.364 ; v1(32.54,17.399) 32.54,17.806 v1(33.759,19.025) ; v1(36.433,22.715) Q4.3 38.059,22.715 38.433,23.089 v1(38.433,23.495)
  Bottom Layer w0.254: v1(33.759,19.025) 33.759,20.244 36.23,22.715 v1(36.433,22.715) ; v1(38.433,23.495) R7.2@38.433,24.712
NetQ4_1: Q4.1 R8.2 | length 2
  Top Layer w0.254: R8.2@36.53,18.465 Q4.1
NetQ5_1: Q5.1 R10.1 | length 3
  Bottom Layer w0.254: R10.1 45.543,21.868 45.895,22.22 Q5.1
NetQ6_1: Q6.1 Q7.3 R12.2 | length 12.8
  Top Layer w0.254: Q6.1 33.867,53.27 34.572,53.975 34.572,59.665 35.087,60.18 Q7.3 37.322,60.18 37.707,60.565 R12.2
NetQ7_1: Q7.1 R13.2 | length 2
  Top Layer w0.254: R13.2@35.895,55.93 Q7.1
NetQ8_1: Q8.1 Q9.3 R16.2 | length 10.4
  Top Layer w0.254: Q8.1 34.4,38.36 34.775,38.735 34.775,41.783 36.027,43.035 Q9.3 38.317,43.872 v1(38.317,44.425)
NetQ9_1: Q9.1 R17.2 | length 2
  Top Layer w0.254: R17.2 Q9.1@36.58,40.735
NetR9_1: R9.1 U2.3 | length 6.6
  Top Layer w0.381: U2.3 v1(75.02,79.82)
  Bottom Layer w0.381: v1(75.02,79.82) R9.1
NetR11_1: R11.1 U2.10 | length 5.9
  Top Layer w0.254: v1(82.73,71.857) U2.10@86.463,71.857
  Bottom Layer w0.254: R11.1 82.3,71.426 v1(82.73,71.857)
NetR25_2: R25.2 U6.60 | length 1.6
  Top Layer w0.254: U6.60 55.105,25.314 55.298,25.121 v2(55.298,24.714)
NetR26_2: R26.2 R27.1 U10.2 | length 17.1
  Top Layer w0.254: v1(55.654,16.18) 56.407,16.18 56.661,16.434 60.429,16.434 v1(60.734,16.129) ; v1(64.239,15.57) 64.29,15.621 U10.2
  Bottom Layer w0.254: R26.2 54.941,16.18 v1(55.654,16.18) ; R27.1 58.7,20.92 59.566,20.055 59.584,20.055 60.004,19.634 60.004,16.757 v1@60.683,16.078 ; v1@60.734,16.078 63.325,16.078 63.833,15.57 v1(64.239,15.57)
NetR27_2: R27.2 R28.2 U10.1 | length 13
  Bottom Layer w0.254: R28.2 R27.2 56.9,20.079 57.33,19.648 59.416,19.648 59.579,19.485 59.579,17.853 59.566,17.839 59.566,16.383 60.378,15.57 v1(63.02,15.57)
NetR30_2: R30.2 U10.3 | length 11.8
  Top Layer w0.254: v1(65.458,15.164) 65.458,16.803 U10.3
  Bottom Layer w0.254: R30.2 58.7,15.826 59.566,14.961 65.255,14.961 v1(65.458,15.164)
NetR38_1: R38.1 U7.8 | length 2.3
  Bottom Layer w0.254: R38.1 U7.8
NetR39_1: R39.1 U7.7 | length 2.3
  Bottom Layer w0.254: R39.1 U7.7
NetR40_1: R40.1 U7.6 | length 2.9
  Bottom Layer w0.254: R40.1 U7.6
PGND: C5.2 C6.2 C11.1 D1.2 P2.3 P3.2 P4.2 P6.7 P14.3 P15.3 P16.2 Q1.3 Q3.3 Q5.2 Q6.3 Q8.3 R1.1 R3.2 R29.1 R30.1 R41.1 U1.5 U3.2 U7.5 U10.4 | length 204.6
  Top Layer w0.254: D1.2@26.014,68.809 v2(30.508,68.809)
  Top Layer w0.508: D1.2@26.014,68.809 D1.2 ; v3(37.01,66.37) 37.01,67.386 37.874,68.25 C5.2 38.06,70.265 40.668,72.873 U3.2@40.668,80.76 ; v3(37.29,63.398) 38.026,64.135 R1.1 ; v3(48.542,15.164) 48.552,15.174 v3(48.552,18.222) ; v3@56.9,15.188 56.987,15.275 v3(56.987,15.646) ; U7.5 80.038,23.8 81.562,22.276 v3(81.562,15.164) ; v3(80.902,51.334) 81.105,51.13 v3(81.105,48.895)
  Top Layer w1.27: v5(29.968,21.33) Q3.3 ; v5(30.4,32.125) Q1.3 ; v5(32.337,41.377) 32.505,41.545 Q8.3
  Top Layer w3.81: v6(32.337,82.195) U3.2@39.125,82.195
  Bottom Layer w0.508: v3@37.01,63.398 37.01,60.681 40.465,57.226 45.403,57.226 P4.2 52.047,59.055 58.55,52.553 62.41,52.553 63.833,53.975 R3.2 65.117,56.276 66.678,57.836 U1.5 68.483,56.844 72.164,53.162 79.073,53.162 v3(80.902,51.334) ; v3@37.01,63.729 v3(37.01,66.37) ; v3(48.552,18.222) Q5.2 ; R29.1 R30.1 56.987,18.582 v3(56.987,15.646)
  Bottom Layer w1.27: 28.108,32.233 28.215,32.125 v5(30.4,32.125) ; 28.108,41.58 28.311,41.377 v5(32.337,41.377)
  Bottom Layer w2.54: v5@29.898,21.26 28.108,23.051 28.108,32.233 28.108,41.58 28.108,67.669 32.337,71.898 v6(32.337,82.195)
  Bottom Layer w3.81: P3.2 v6(32.337,82.195)
  other v2: 76.634,7.036 79.339,7.112 72.977,14.351
  other v3: 36.807,81.097 38.807,81.097 40.807,81.097 42.807,81.097 44.807,81.097 36.807,83.097 38.807,83.097 40.807,83.097 42.807,83.097 44.807,83.097 36.807,85.097 38.807,85.097 40.807,85.097 42.807,85.097 44.807,85.097 36.807,87.097 38.807,87.097 40.807,87.097 42.807,87.097 44.807,87.097
PUMP1: R17.1 R35.1 U6.36 | length 14.3
  Top Layer w0.254: R35.1 R17.1 v2(39.652,38.735) ; v2(42.903,38.735) 44.732,36.906 44.732,35.484 46.216,34 U6.36
  Bottom Layer w0.254: v2(39.652,38.735) 39.855,38.938 39.994,38.799 42.839,38.799 v2(42.903,38.735)
PUMP2: R6.1 R32.1 U6.37 | length 15.4
  Top Layer w0.254: R32.1 R6.1 41.684,28.575 41.934,28.826 v2(41.934,32.194) ; v2(46.154,33.249) 46.31,33.404 46.872,33.404 46.967,33.5 U6.37
  Bottom Layer w0.254: v2(41.934,32.194) 41.973,32.233 42.7,32.233 43.716,33.249 v2(46.154,33.249)
SGND: BT1.2 C3.2 C4.2 C7.2 C8.2 C14.2 C15.2 C18.1 C19.1 C20.2 C22.2 C23.1 C24.2 C26.2 P9.2 P9.11 P11.4 P12.4 Q2.2 Q4.2 Q7.2 Q9.2 R1.2 R11.2 R18.1 R22.1 R22.2 R22.3 R22.4 R22.7 R25.1 S1.1 S2.1 S2.2 U2.9 U4.1 U5.1 U5.4 U5.8 U6.12 U6.18 U6.31 U6.47 U6.63 U8.1 U9.4 | length 105
  Top Layer w0.254: Q4.2 v2@38.43,21.867 ; Q2.2 38.43,31.781 40.711,34.062 41.481,34.062 v2(41.887,34.468) ; U6.47 48.924,28.5 v1(49.202,28.778) ; v2(49.812,38.532) 49.812,38.29 50.105,37.997 U6.31 ; v2(56.314,24.511) 56.605,24.802 U6.63 ; U6.18 56.605,36.209 v2(56.924,35.89) ; v2(61.443,42.621) 62.463,41.601 66.376,41.601 66.726,41.91 U5.8@67.835,41.91 ; v2(62.433,36.652) 62.484,36.703 v2(62.484,37.897) ; U5.8 68.767,41.945 69.267,42.445 U5.4 71.705,42.445 71.961,42.19 71.961,41.174 71.732,40.945 U5.1
  Top Layer w0.508: S2.2 S2.1 23.015,50.749 23.802,51.537 v3(38.23,51.537) ; v3@40.755,62.735 R1.2 ; C7.2@44.326,65.089 v3(44.326,66.574) 44.639,66.574 C8.2 ; C8.2@49.29,71.225 U4.1 ; U4.1@49.406,76.327 v3(49.406,77.546) ; v3(78.49,66.397) 78.49,63.135 C4.2 ; S1.1 U2.9@86.185,69.505
  Bottom Layer w0.254: v2(56.314,24.511) 56.329,24.511 C24.2 ; C22.2@61.951,38.125 62.18,37.897 v2(62.484,37.897)
  Bottom Layer w0.508: v3(40.731,62.586) 42.166,62.586 44.326,64.745 v3(44.326,66.574) ; v3(49.406,77.546) 49.202,77.546 55.603,83.947 BT1.2 ; v3(78.49,66.397) C3.2 ; R11.2 84.1,65.61 85.41,64.3 S1.1
  other v2: 38.433,21.87 68.303,44.222
SR_D0: R5.2 U6.11 | length 25.1
  Top Layer w0.254: U6.11 60.13,33 60.49,32.639 v1(60.582,32.639)
  Bottom Layer w0.254: v1(60.582,32.639) 78.26,32.639 79.265,33.644 R5.2
SR_D1: R36.2 U6.15 | length 24.6
  Top Layer w0.254: U6.15 62.333,35 63.02,35.687 v1(63.02,39.142)
  Bottom Layer w0.254: v1(63.02,39.142) 63.223,39.345 72.367,39.345 73.332,40.31 R36.2
SR_D2: R37.2 U6.14 | length 26.9
  Top Layer w0.254: U6.14 62.442,34.5 63.63,35.687 v1(63.63,38.532) ; v1(73.586,39.751) 73.586,41.783 v1(73.993,42.19)
  Bottom Layer w0.254: v1(63.63,38.532) 64.036,38.938 72.536,38.938 73.348,39.751 v1(73.586,39.751) ; v1(73.993,42.19) v1@74.039,42.236 ; 74.242,42.236 78.604,42.236 78.604,42.85 R37.2
SR_LED: P9.3
SR_SW: P9.4
SR_VT: P9.5
SW1: S2.4 U6.42 | length 32.6
  Top Layer w0.254: S2.4 31.664,48.171 31.664,45.988 31.118,45.441 31.118,38.002 32.823,36.297 v2(34.775,36.297) ; v2(42.903,35.89) 42.903,34.468 44.859,32.512 44.859,32.071 45.93,31 U6.42
  Bottom Layer w0.254: v2(34.775,36.297) 42.497,36.297 v2(42.903,35.89)
SW2: S2.3 U6.43 | length 30.9
  Top Layer w0.254: S2.3 30.824,46.66 30.305,46.14 30.305,38.24 31.321,37.224 31.321,35.078 32.54,33.858 v2(34.775,33.858) ; v2(43.106,33.452) 43.106,33.394 44.453,32.047 44.453,31.903 45.855,30.5 U6.43
  Bottom Layer w0.254: v2(34.775,33.858) 42.7,33.858 v2(43.106,33.452)
SWCLK: P11.3 U6.49 | length 17.4
  Top Layer w0.254: P11.3 41.938,35.23 42.497,34.671 42.497,26.34 v2(42.624,26.213) ; v2(49.087,26.225) U6.49
  Bottom Layer w0.254: v2(42.624,26.213) 49.075,26.213 v2(49.087,26.225)
SWDIO: P11.2 U6.46 | length 17.5
  Top Layer w0.254: v2(39.652,29.185) 39.652,32.233 40.109,32.69 P11.2 ; v2(46.358,28.778) 46.579,29 U6.46
  Bottom Layer w0.254: v2(39.652,29.185) 39.837,29 42.7,29 42.954,29 42.954,30.167 43.462,30.167 43.462,29 43.97,29 43.97,30.167 44.478,30.167 44.478,29 45.545,29 45.748,28.778 v2(46.358,28.778)
TEM: R19.1 U6.39 U8.2 | length 18.5
  Top Layer w0.254: U8.2 46.713,42.85 v1(46.764,42.799) 47.374,42.19 47.374,37.922 49.202,36.094 49.202,32.842 48.86,32.5 U6.39 ; v1(47.374,45.441) 47.374,45.847 47.577,46.05 R19.1
  Bottom Layer w0.254: v1(46.764,42.799) 47.374,43.409 v1(47.374,45.441)
TTIM_IO: U6.22 U9.6 | length 23.8
  Top Layer w0.254: U6.22 54.605,38.889 55.365,39.65 v1(56.111,39.65) ; v1(71.758,37.516) 71.961,37.313 71.961,35.844 72.499,35.306 U9.6
  Bottom Layer w0.254: v1(56.111,39.65) 62.309,39.65 62.512,39.446 62.512,38.931 63.419,38.024 71.453,38.024 71.758,37.719 v1(71.758,37.516)
TTIM_RSI: U6.23 U9.5 | length 23.9
  Top Layer w0.254: U6.23 54.105,38.964 55.298,40.158 v1(55.502,40.158) ; v1(71.351,40.158) 73.378,38.131 U9.5
  Bottom Layer w0.254: v1(55.502,40.158) 55.603,40.259 71.25,40.259 v1(71.351,40.158)
TTIM_SCLK: U6.21 U9.7 | length 24.2
  Top Layer w0.254: U6.21 55.105,38.643 55.112,38.643 v1(55.61,39.142) ; v1(71.148,36.906) 71.148,34.671 71.783,34.036 U9.7
  Bottom Layer w0.254: v1(55.61,39.142) 58.143,39.142 58.55,38.735 58.55,37.516 58.753,37.313 71.148,37.313 v1(71.148,36.906)
WIFI_RX: U2.15 U6.16 | length 58.3
  Top Layer w0.254: U6.16 58.88,42.723 77.041,60.884 77.041,73.279 85.582,81.82 U2.15
WIFI_TX: U2.16 U6.17 | length 58.7
  Top Layer w0.254: U6.17 57.105,41.964 v1(57.127,41.986) ; v1(59.159,44.018) 76.228,61.087 76.228,73.548 U2.16
  Bottom Layer w0.254: v1(57.127,41.986) v1(59.159,44.018)
YF_BUSY: R38.2 U6.2 | length 20.1
  Top Layer w0.254: U6.2 59.641,28.5 59.972,28.169 59.972,20.447 v2(60.175,20.244)
  Bottom Layer w0.254: v2(60.175,20.244) 69.486,20.244 70.375,19.355 R38.2@70.64,19.355
YF_DATA: R39.2 U6.3 | length 23.8
  Top Layer w0.254: U6.3 59.75,29 60.378,28.372 60.378,21.057 60.785,20.65 v2(60.785,19.228)
  Bottom Layer w0.254: v2(60.785,19.228) 68.643,19.228 69.026,18.846 72.594,18.846 73.104,19.355 R39.2@73.18,19.355
YF_RESET: R40.2 U6.4 | length 27.1
  Top Layer w0.254: U6.4 59.825,29.5 60.785,28.54 60.785,21.225 61.394,20.616 v2(61.394,18.618)
  Bottom Layer w0.254: v2(61.394,18.618) 68.678,18.618 68.857,18.439 73.814,18.439 74.464,19.09 R40.2
pads on no net: BT1.3 BT1.4 P9.1 P9.9 U1.3 U1.4 U2.2 U2.4 U2.5 U2.6 U2.7 U2.11 U2.12 U2.13 U2.14 U4.4 U5.0 U5.2 U5.5 U5.10 U6.1 U6.20 U6.24 U6.25 U6.26 U6.38 U6.40 U6.61 U6.62 U10.5 U10.6 U10.7

## Polygon pours and split planes (outlines as drawn)
PGND on Bottom Layer "Bottom PND" (solid, remove dead copper, pour order 8): 88.42,87.3 88.42,69.52 35.08,69.52 35.08,16.18 85.88,16.18 88.42,16.18 88.42,3.48 9.68,3.48 9.68,13.64 30,13.64 30,87.3
SGND on Bottom Layer "Bottom SGND" (solid, remove dead copper, pour order 5): 88.42,18.72 37.62,18.72 37.62,66.98 88.42,66.98
SGND on Top Layer "TOP SGND" (solid, remove dead copper, pour order 6): 88.42,66.98 88.42,18.72 37.62,18.72 37.62,66.98
PGND on Top Layer "TOP PND" (solid, remove dead copper, pour order 7): 88.42,87.3 88.42,69.52 35.08,69.52 35.08,16.18 85.88,16.18 88.42,16.18 88.42,3.48 9.68,3.48 9.68,13.64 30,13.64 30,87.3

## Silkscreen, mask and mechanical layers (free items; w line width, h text height)
Top Overlay:
  circle w0.254: c46.408,76.305 r3.667
  circle w0.254: c41.23,81.483 r3.667
  circle w0.254: c36.052,76.302 r3.667
  circle w0.254: c41.23,71.12 r3.667
  lines w0.203: 28.73,63.805 28.73,88.805 53.73,88.805 53.73,63.805 28.73,63.805
Mechanical 13:
  lines w0.203: 0,89 0,0 96,0 96,89.002 0,89.002 ; 28.73,88.805 28.73,88.805 ; 53.73,88.805 53.73,88.805

## Text inside footprints (layer, text, board x,y; h text height)
P9: Top Overlay "ANT" at 81.93,7.62 h1 r270